# Altium PCB PIEZO_ver2_pcb1.PcbDoc
Units mil, origin at the board's own origin, x right, y up, seen from the top; angles counter-clockwise.
Board outline 690.03 x 755.03 mil, 2 copper layers (Top Layer, Bottom Layer); 7 components, 10 nets, 27 pads, 0 vias.
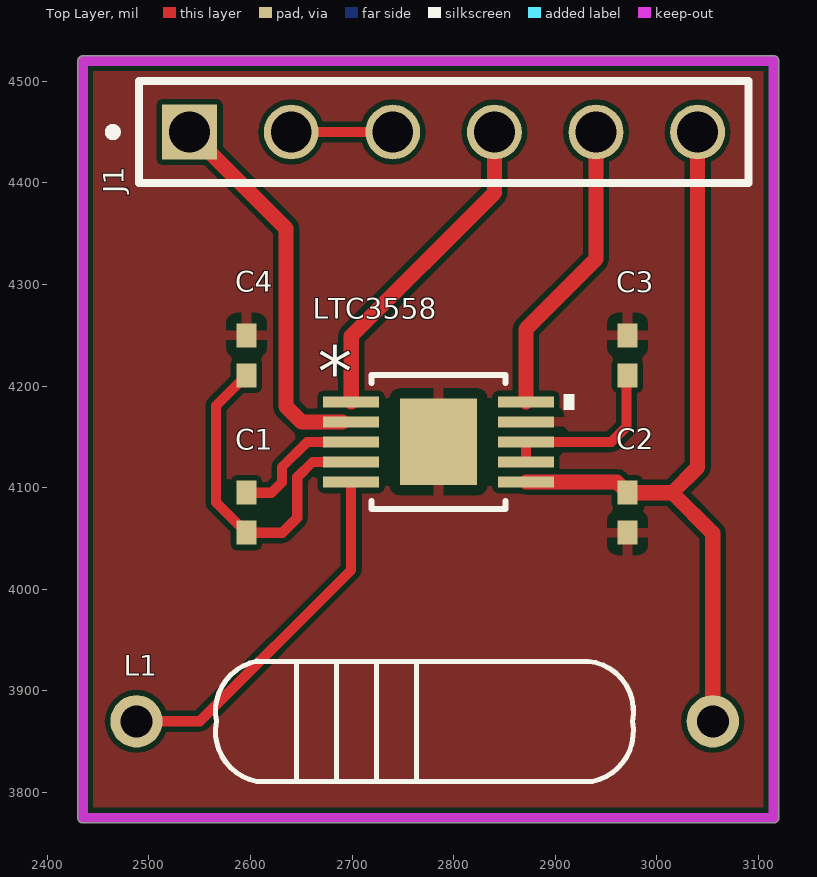
[diagram p0: Top Layer view]
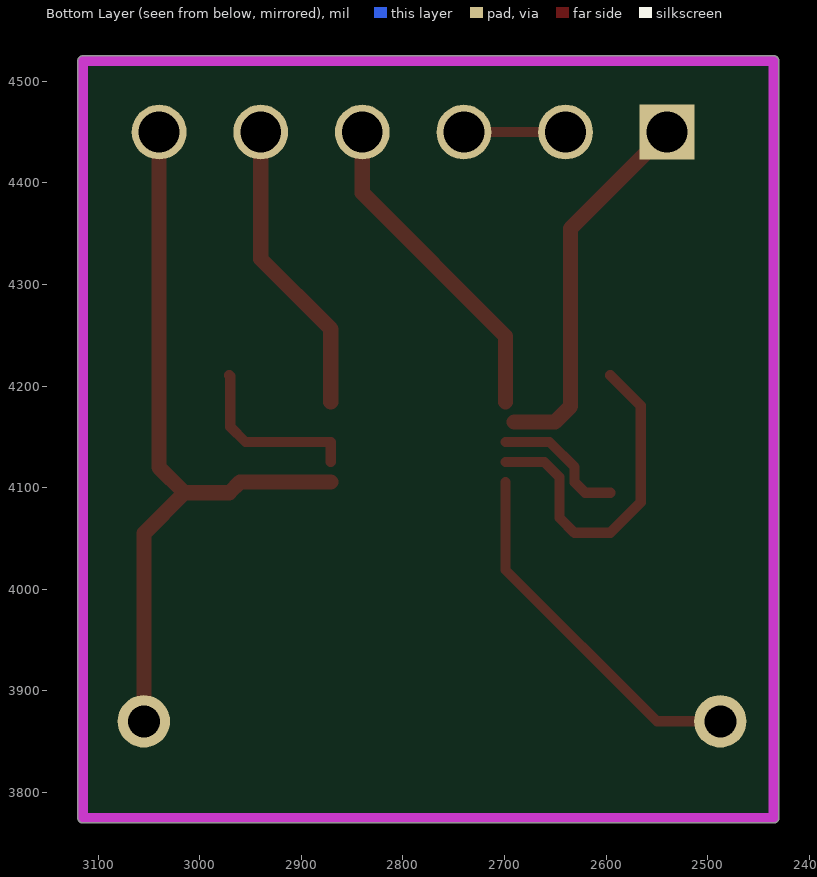
[diagram p1: Bottom Layer view, seen from below]

## Layer stack, top to bottom
Top Solder: solder mask 0.4, Solder Resist, Dk 3.5
Top Layer: signal copper 1.4
Dielectric 1: dielectric 12.6, FR-4, Dk 4.8
Bottom Layer: signal copper 1.4
Bottom Solder: solder mask 0.4, Solder Resist, Dk 3.5

## Board outline
2435,3769.99 cw(c2435,3775) 2429.99,3775 2429.99,4520 cw(c2435,4520) 2435,4525.02 3115,4525.02 cw(c3115,4520) 3120.01,4520 3120.01,3775 cw(c3115,3775) 3115,3769.99

## Design rules (kind name [scope] priority, off if disabled: settings)
Clearance [All] p1: gap=5 ignorepadtopadclearanceinfootprint=FALSE
PolygonConnect [All] p1: connectstyle=Relief reliefconductorwidth=10 reliefentries=4 polygonreliefangle="90 Angle" airgapwidth=10
RoutingVias [All] p1: holewidth=28 width=50 viastyle="Through Hole" minholewidth=28 minwidth=50 maxholewidth=28 maxwidth=50
SolderMaskExpansion [All] p1: expansion=4
Width power [InNetClass('power')] p1: maxlimit=15 minlimit=10 preferedwidth=15
Width signals [InNetClass('signals')] p2: maxlimit=10 minlimit=10 preferedwidth=10
30 further rules are at their usual default settings.

## Components (designator, comment, footprint, x,y, rotation, side; value= is the part's Value field where it differs from the comment)
C1 "Cap" 0402 2596,4075.3 r90 top value=1uF
C2 "Cap" 0402 2971,4075.3 r90 top value=47uF
C3 "Cap" 0402 2971,4230.3 r90 top value=4.7uF
C4 "Cap" 0402 2596,4230.3 r90 top value=10uF
J1 "MTSW-106-09-G-S-250" SAMTEC_MTSW-106-09-G-S-250 2790,4450 r180 top
L1 "77F470J-TR-RC" 77F 2487.68,3870 r0 top
LTC3558 "LTC3588IMSE-1PBF" MSOP-10_MSE 2785,4145 r0 top

## Footprints (in the part's own frame and the unit in brackets; to place one, negate y for a bottom-side part, rotate by r counter-clockwise, add the part's x,y. Pads: shape width x height; smd on the part's side, far side on the other; paste and mask are expansions set on the pad)
77F [mm]
  round 1.308 hole 0.8: P$1(0,0) P$2(14.41,0)
  silkscreen extent 1.98,-1.5 12.42,1.5, body extent -0.53,-1.96 15,2.03, height 3.99
0402 [mm] "Chip Capacitor, Body 1.0x0.5mm, IPC High Density"
  rect 0.6x0.5 smd: 1(-0.5,0) 2(0.5,0)
  body extent -0.55,-0.3 0.55,0.3, height 1.3
MSOP-10_MSE [mil]
  rect 55x11 smd: 1(-86,39.4) 2(-86,19.7) 3(-86,0) 4(-86,-19.7) 5(-86,-39.4) 6(86,-39.4) 7(86,-19.7) 8(86,0) 9(86,19.7) 10(86,39.4)
  rect 76x85 smd paste-78.74: 11(0,0)
  silkscreen extent -66,-66 134,66
SAMTEC_MTSW-106-09-G-S-250 [mm]
  rect 1.37x1.37 / inner round 1.37 / far side rect 1.37x1.37 hole 1.02: 01(6.35,0)
  round 1.37 hole 1.02: 02(3.81,0) 03(1.27,0) 04(-1.27,0) 05(-3.81,0) 06(-6.35,0)
  silkscreen extent -7.62,-1.27 8.37,1.27

## Part data
C1 C2 C3 C4: "Capacitor", LatestRevisionDate=17-Jul-2002, LatestRevisionNote="Re-released for DXP Platform.", PackageDescription="Radial Cap, Thru-Hole; 2 Leads; 0.3 in Pin Spacing", PackageReference=RAD-0.3, Published=8-Jun-2000, Publisher="Altium Limited"
J1 LTC3558: Package=None, Availability=Unavailable, Price=None
  J1: MP=MTSW-106-09-G-S-250
  LTC3558: MP=LTC3588IMSE-1PBF
L1: "47 µH Unshielded Drum Core, Wirewound Inductor 340 mA 1.3Ohm Max Axial", Package=Package, Check_prices=https://www.snapeda.com/parts/77F470J-TR-RC/Bourns/view-part/?ref=eda, MF=Bourns, MP=77F470J-TR-RC, SnapEDA_Link=https://www.snapeda.com/parts/77F470J-TR-RC/Bourns/view-part/?ref=snap

## Nets (pads, with @x,y where several pads share a name; then routed paths per layer and width w, separated by ;. In a path a pad name is that pad's centre, name@x,y a point inside that pad or via, vN(x,y) a via of type N, cw(c..) or ccw(c..) an arc to the next point about the centre after c; other vN are vias at no path point)
GND: C2.1 C3.2 C4.2 LTC3558.9 LTC3558.11
NetC1_1: C1.1 C4.1 LTC3558.4 | length 335.1
  Top Layer w10: C4.1 2566,4180.62 2566,4085.61 C1.1 2631.32,4055.61 2646,4070.3 2646,4110.3 2661,4125.3 LTC3558.4
NetC1_2: C1.2 LTC3558.3 | length 132.5
  Top Layer w10: C1.2 2620.69,4094.99 2631,4105.3 2631,4120.3 2655.7,4145 LTC3558.3
NetC3_1: C3.1 LTC3558.7 LTC3558.8 | length 175.9
  Top Layer w10: LTC3558.7 LTC3558.8 2955,4145 2970,4160 2970,4209.62 C3.1
NetJ1_02: J1.02 J1.03 | length 100
  Top Layer w10: J1.02 J1.03
NetL1_P$1: L1.P$1 LTC3558.5 | length 359.6
  Top Layer w10: L1.P$1 2550,3870 2699,4019 LTC3558.5
PGOOD: J1.05 LTC3558.10 | length 294.2
  Top Layer w15: LTC3558.10 2871,4256 2940,4325 J1.05
PZ1: J1.04 LTC3558.1 | length 324
  Top Layer w15: LTC3558.1 2699,4249 2840,4390 J1.04
PZ2: J1.01 LTC3558.2 | length 371.1
  Top Layer w15: J1.01 2635,4355 2635,4180 2650.3,4164.7 LTC3558.2@2690.42,4164.7
VOUT: C2.2 J1.06 L1.P$2 LTC3558.6 | length 755.3
  Top Layer w15: LTC3558.6 2960.39,4105.6 C2.2 3015.01,4094.99 ; J1.06 3040,4119.97 3015.01,4094.99 ; L1.P$2 3055,4055 3015.01,4094.99

## Polygon pours and split planes (outlines as drawn)
GND on Top Layer "GND" (solid, pour order 0): 2435,4520 3115,4520 3115,3775 2435,3775

## Keep-outs
Keep-Out Layer:
  lines w10: 2435,3775 3115,3775 3115,4520 2435,4520 2435,3775

## Text inside footprints (layer, text, board x,y; h text height)
LTC3558: Top Overlay "*" at 2666,4190 h50; Mechanical 13 "*" at 2716,4153 h50